# Altium PCB BBB_Board_NO_PLANES.PcbDoc
Units mil, origin at the board's own origin, x right, y up, seen from the top; angles counter-clockwise.
Board outline 11000 x 5000 mil, 2 copper layers (Top Layer, Bottom Layer); 109 components, 382 nets, 1064 pads, 0 vias.
Unrouted connection lines stored in the file: 670.
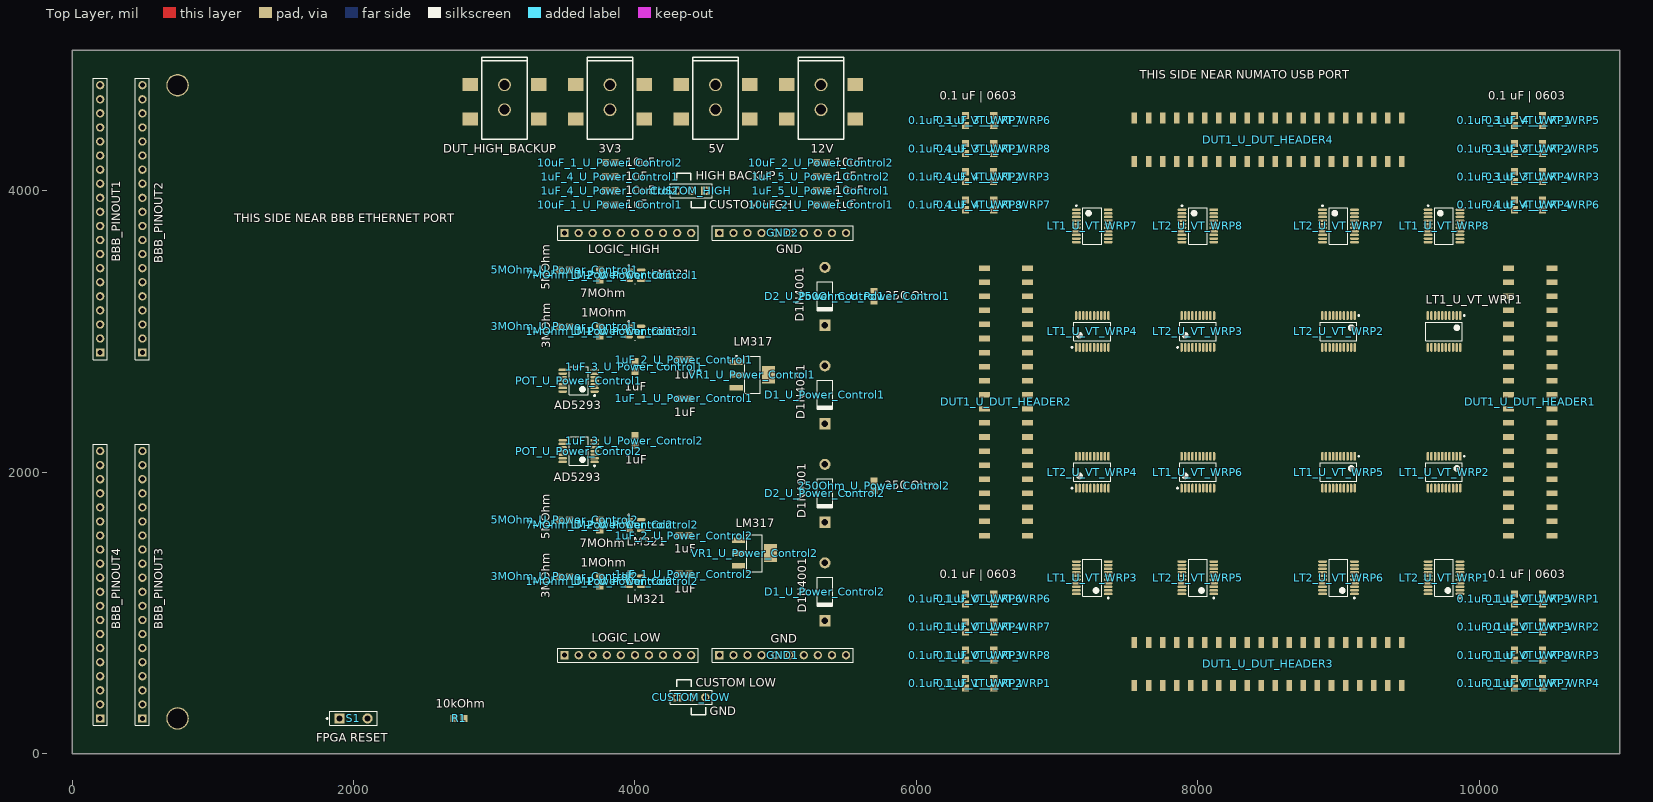
[diagram p0: Top Layer view]
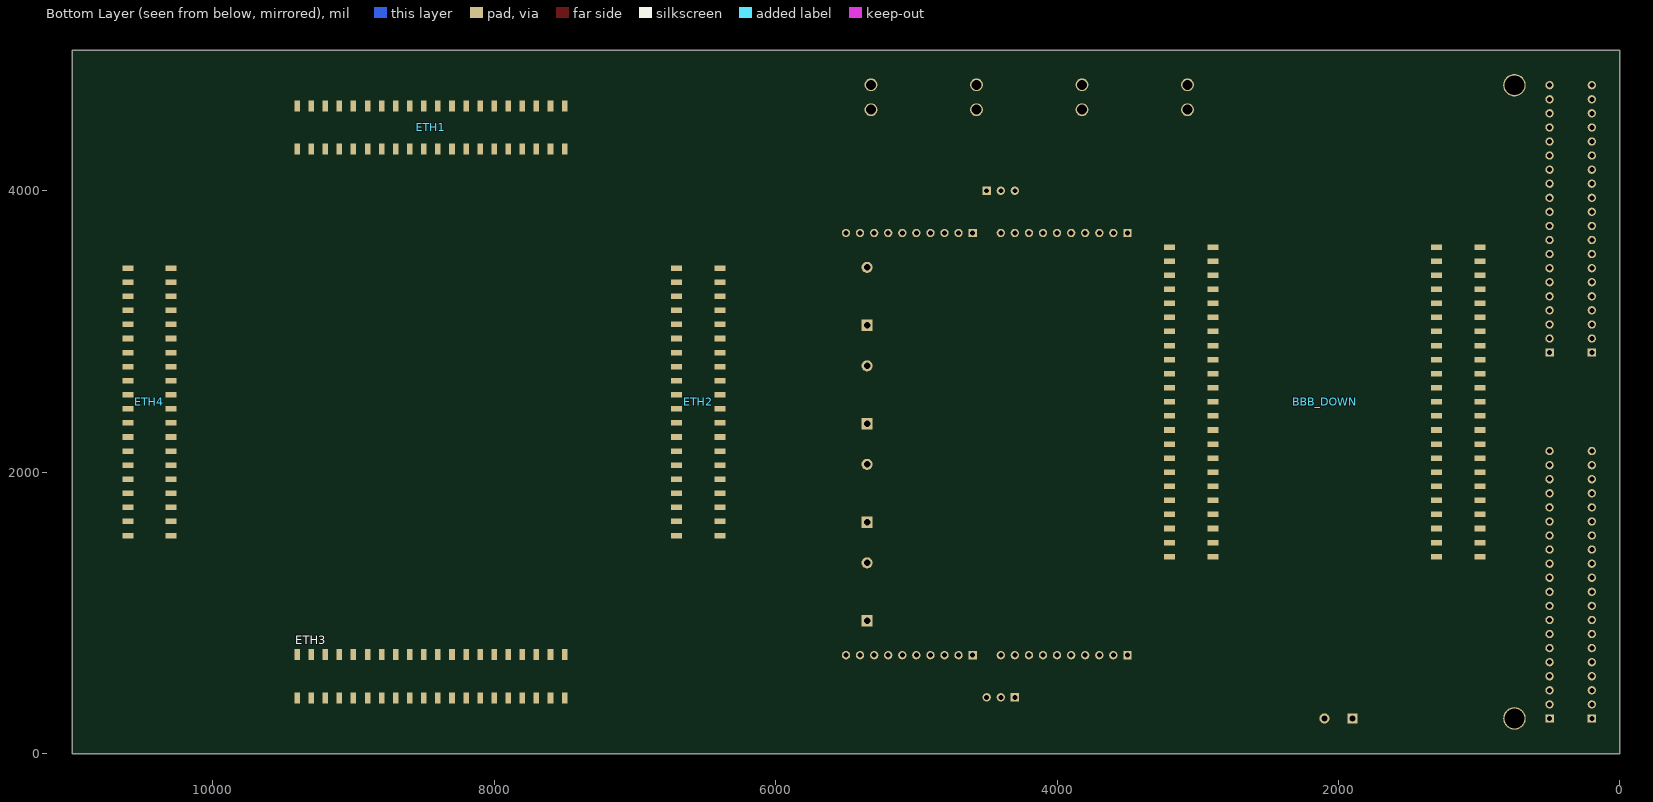
[diagram p1: Bottom Layer view, seen from below]

## Layer stack, top to bottom
Top Solder: solder mask 0.4, Solder Resist, Dk 3.5
Top Layer: signal copper 1.4
Dielectric 1: dielectric 12.6, FR-4, Dk 4.8
Bottom Layer: signal copper 1.4
Bottom Solder: solder mask 0.4, Solder Resist, Dk 3.5

## Board outline
0,0 11000,0 11000,5000 0,5000

## Design rules (kind name [scope] priority, off if disabled: settings)
Clearance [All] p1: gap=6
PolygonConnect [All] p1: connectstyle=Relief reliefconductorwidth=10 reliefentries=4 polygonreliefangle="90 Angle" airgapwidth=10
RoutingVias [All] p1: holewidth=15 width=30 viastyle="Through Hole" minholewidth=28 minwidth=50 maxholewidth=28 maxwidth=50
SolderMaskExpansion [All] p1: expansion=4
Width [All] p1: maxlimit=10 minlimit=10 preferedwidth=10
30 further rules are at their usual default settings.

## Classes and differential pairs
component class BBB_Board: 3V3 5V 12V BBB_DOWN BBB_PINOUT1 BBB_PINOUT2 BBB_PINOUT3 BBB_PINOUT4 CUSTOM_HIGH CUSTOM_LOW DUT_HIGH_BACKUP GND1 GND2 LOGIC_HIGH LOGIC_LOW R1 S1
component class U_DUT_HEADER1: DUT1_U_DUT_HEADER1
component class U_DUT_HEADER2: DUT1_U_DUT_HEADER2
component class U_DUT_HEADER3: DUT1_U_DUT_HEADER3
component class U_DUT_HEADER4: DUT1_U_DUT_HEADER4
component class U_NUMATO_HDR: ETH1 ETH2 ETH3 ETH4
component class U_Power_Control1: 1MOhm_U_Power_Control1 1uF_1_U_Power_Control1 1uF_2_U_Power_Control1 1uF_3_U_Power_Control1 1uF_4_U_Power_Control1 1uF_5_U_Power_Control1 3MOhm_U_Power_Control1 5MOhm_U_Power_Control1 7MOhm_U_Power_Control1 10uF_1_U_Power_Control1 10uF_2_U_Power_Control1 250Ohm_U_Power_Control1 D1_U_Power_Control1 D2_U_Power_Control1 LM1_U_Power_Control1 LM2_U_Power_Control1 POT_U_Power_Control1 VR1_U_Power_Control1
component class U_Power_Control2: 1MOhm_U_Power_Control2 1uF_1_U_Power_Control2 1uF_2_U_Power_Control2 1uF_3_U_Power_Control2 1uF_4_U_Power_Control2 1uF_5_U_Power_Control2 3MOhm_U_Power_Control2 5MOhm_U_Power_Control2 7MOhm_U_Power_Control2 10uF_1_U_Power_Control2 10uF_2_U_Power_Control2 250Ohm_U_Power_Control2 D1_U_Power_Control2 D2_U_Power_Control2 LM1_U_Power_Control2 LM2_U_Power_Control2 POT_U_Power_Control2 VR1_U_Power_Control2
component class U_VT_WRP1: 0.1uF_0_U_VT_WRP1 0.1uF_1_U_VT_WRP1 0.1uF_3_U_VT_WRP1 0.1uF_4_U_VT_WRP1 LT1_U_VT_WRP1 LT2_U_VT_WRP1
component class U_VT_WRP2: 0.1uF_0_U_VT_WRP2 0.1uF_1_U_VT_WRP2 0.1uF_3_U_VT_WRP2 0.1uF_4_U_VT_WRP2 LT1_U_VT_WRP2 LT2_U_VT_WRP2
component class U_VT_WRP3: 0.1uF_0_U_VT_WRP3 0.1uF_1_U_VT_WRP3 0.1uF_3_U_VT_WRP3 0.1uF_4_U_VT_WRP3 LT1_U_VT_WRP3 LT2_U_VT_WRP3
component class U_VT_WRP4: 0.1uF_0_U_VT_WRP4 0.1uF_1_U_VT_WRP4 0.1uF_3_U_VT_WRP4 0.1uF_4_U_VT_WRP4 LT1_U_VT_WRP4 LT2_U_VT_WRP4
component class U_VT_WRP5: 0.1uF_0_U_VT_WRP5 0.1uF_1_U_VT_WRP5 0.1uF_3_U_VT_WRP5 0.1uF_4_U_VT_WRP5 LT1_U_VT_WRP5 LT2_U_VT_WRP5
component class U_VT_WRP6: 0.1uF_0_U_VT_WRP6 0.1uF_1_U_VT_WRP6 0.1uF_3_U_VT_WRP6 0.1uF_4_U_VT_WRP6 LT1_U_VT_WRP6 LT2_U_VT_WRP6
component class U_VT_WRP7: 0.1uF_0_U_VT_WRP7 0.1uF_1_U_VT_WRP7 0.1uF_3_U_VT_WRP7 0.1uF_4_U_VT_WRP7 LT1_U_VT_WRP7 LT2_U_VT_WRP7
component class U_VT_WRP8: 0.1uF_0_U_VT_WRP8 0.1uF_1_U_VT_WRP8 0.1uF_3_U_VT_WRP8 0.1uF_4_U_VT_WRP8 LT1_U_VT_WRP8 LT2_U_VT_WRP8
net class IVL_B[127..0]: IVL_B0 IVL_B1 IVL_B2 IVL_B3 IVL_B4 IVL_B5 IVL_B6 IVL_B7 IVL_B8 IVL_B9 IVL_B10 IVL_B11 IVL_B12 IVL_B13 IVL_B14 IVL_B15 IVL_B16 IVL_B17 IVL_B18 IVL_B19 IVL_B20 IVL_B21 IVL_B22 IVL_B23 IVL_B24 IVL_B25 IVL_B26 IVL_B27 IVL_B28 IVL_B29 IVL_B30 IVL_B31 IVL_B32 IVL_B33 IVL_B34 IVL_B35 IVL_B36 IVL_B37 IVL_B38 IVL_B39 IVL_B40 IVL_B41 IVL_B42 IVL_B43 IVL_B44 IVL_B45 IVL_B46 IVL_B47 IVL_B48 IVL_B49 IVL_B50 IVL_B51 IVL_B52 IVL_B53 IVL_B54 IVL_B55 IVL_B56 IVL_B57 IVL_B58 IVL_B59 IVL_B60 IVL_B61 IVL_B62 IVL_B63 IVL_B64 IVL_B65 IVL_B66 IVL_B67 IVL_B68 IVL_B69 IVL_B70 IVL_B71 IVL_B72 IVL_B73 IVL_B74 IVL_B75 IVL_B76 IVL_B77 IVL_B78 IVL_B79 IVL_B80 IVL_B81 IVL_B82 IVL_B83 IVL_B84 IVL_B85 IVL_B86 IVL_B87 IVL_B88 IVL_B89 IVL_B90 IVL_B91 IVL_B92 IVL_B93 IVL_B94 IVL_B95 IVL_B96 IVL_B97 IVL_B98 IVL_B99 IVL_B100 IVL_B101 IVL_B102 IVL_B103 IVL_B104 IVL_B105 IVL_B106 IVL_B107 IVL_B108 IVL_B109 IVL_B110 IVL_B111 IVL_B112 IVL_B113 IVL_B114 IVL_B115 IVL_B116 IVL_B117 IVL_B118 IVL_B119 IVL_B120 IVL_B121 IVL_B122 IVL_B123 IVL_B124 IVL_B125 IVL_B126 IVL_B127
net class OVCC_B[127..0]: OVCC_B0 OVCC_B1 OVCC_B2 OVCC_B3 OVCC_B4 OVCC_B5 OVCC_B6 OVCC_B7 OVCC_B8 OVCC_B9 OVCC_B10 OVCC_B11 OVCC_B12 OVCC_B13 OVCC_B14 OVCC_B15 OVCC_B16 OVCC_B17 OVCC_B18 OVCC_B19 OVCC_B20 OVCC_B21 OVCC_B22 OVCC_B23 OVCC_B24 OVCC_B25 OVCC_B26 OVCC_B27 OVCC_B28 OVCC_B29 OVCC_B30 OVCC_B31 OVCC_B32 OVCC_B33 OVCC_B34 OVCC_B35 OVCC_B36 OVCC_B37 OVCC_B38 OVCC_B39 OVCC_B40 OVCC_B41 OVCC_B42 OVCC_B43 OVCC_B44 OVCC_B45 OVCC_B46 OVCC_B47 OVCC_B48 OVCC_B49 OVCC_B50 OVCC_B51 OVCC_B52 OVCC_B53 OVCC_B54 OVCC_B55 OVCC_B56 OVCC_B57 OVCC_B58 OVCC_B59 OVCC_B60 OVCC_B61 OVCC_B62 OVCC_B63 OVCC_B64 OVCC_B65 OVCC_B66 OVCC_B67 OVCC_B68 OVCC_B69 OVCC_B70 OVCC_B71 OVCC_B72 OVCC_B73 OVCC_B74 OVCC_B75 OVCC_B76 OVCC_B77 OVCC_B78 OVCC_B79 OVCC_B80 OVCC_B81 OVCC_B82 OVCC_B83 OVCC_B84 OVCC_B85 OVCC_B86 OVCC_B87 OVCC_B88 OVCC_B89 OVCC_B90 OVCC_B91 OVCC_B92 OVCC_B93 OVCC_B94 OVCC_B95 OVCC_B96 OVCC_B97 OVCC_B98 OVCC_B99 OVCC_B100 OVCC_B101 OVCC_B102 OVCC_B103 OVCC_B104 OVCC_B105 OVCC_B106 OVCC_B107 OVCC_B108 OVCC_B109 OVCC_B110 OVCC_B111 OVCC_B112 OVCC_B113 OVCC_B114 OVCC_B115 OVCC_B116 OVCC_B117 OVCC_B118 OVCC_B119 OVCC_B120 OVCC_B121 OVCC_B122 OVCC_B123 OVCC_B124 OVCC_B125 OVCC_B126 OVCC_B127
channel class DUT_HEADER: U_DUT_HEADER1 U_DUT_HEADER2 U_DUT_HEADER3 U_DUT_HEADER4
channel class POW_CONT: U_Power_Control1 U_Power_Control2
channel class VT_WRP: U_VT_WRP1 U_VT_WRP2 U_VT_WRP3 U_VT_WRP4 U_VT_WRP5 U_VT_WRP6 U_VT_WRP7 U_VT_WRP8

## Components (designator, comment, footprint, x,y, rotation, side; value= is the part's Value field where it differs from the comment)
0.1uF_0_U_VT_WRP1 "0.1uF_0603" 0.1uF_0603 10450,1100 r90 top (schematic designator 0.1uF_0)
0.1uF_0_U_VT_WRP2 "0.1uF_0603" 0.1uF_0603 10450,900 r90 top (schematic designator 0.1uF_0)
0.1uF_0_U_VT_WRP3 "0.1uF_0603" 0.1uF_0603 10450,700 r90 top (schematic designator 0.1uF_0)
0.1uF_0_U_VT_WRP4 "0.1uF_0603" 0.1uF_0603 10450,500 r90 top (schematic designator 0.1uF_0)
0.1uF_0_U_VT_WRP5 "0.1uF_0603" 0.1uF_0603 10250,901 r90 top (schematic designator 0.1uF_0)
0.1uF_0_U_VT_WRP6 "0.1uF_0603" 0.1uF_0603 6550,1100 r90 top (schematic designator 0.1uF_0)
0.1uF_0_U_VT_WRP7 "0.1uF_0603" 0.1uF_0603 6550,900 r90 top (schematic designator 0.1uF_0)
0.1uF_0_U_VT_WRP8 "0.1uF_0603" 0.1uF_0603 6550,700 r90 top (schematic designator 0.1uF_0)
0.1uF_1_U_VT_WRP1 "0.1uF_0603" 0.1uF_0603 6550,500 r90 top (schematic designator 0.1uF_1)
0.1uF_1_U_VT_WRP2 "0.1uF_0603" 0.1uF_0603 6350,500 r90 top (schematic designator 0.1uF_1)
0.1uF_1_U_VT_WRP3 "0.1uF_0603" 0.1uF_0603 6350,700 r90 top (schematic designator 0.1uF_1)
0.1uF_1_U_VT_WRP4 "0.1uF_0603" 0.1uF_0603 6350,900 r90 top (schematic designator 0.1uF_1)
0.1uF_1_U_VT_WRP5 "0.1uF_0603" 0.1uF_0603 10250,1100 r90 top (schematic designator 0.1uF_1)
0.1uF_1_U_VT_WRP6 "0.1uF_0603" 0.1uF_0603 6350,1100 r90 top (schematic designator 0.1uF_1)
0.1uF_1_U_VT_WRP7 "0.1uF_0603" 0.1uF_0603 10250,500 r90 top (schematic designator 0.1uF_1)
0.1uF_1_U_VT_WRP8 "0.1uF_0603" 0.1uF_0603 10250,700 r90 top (schematic designator 0.1uF_1)
0.1uF_3_U_VT_WRP1 "0.1uF_0603" 0.1uF_0603 10250,4500 r270 top (schematic designator 0.1uF_3)
0.1uF_3_U_VT_WRP2 "0.1uF_0603" 0.1uF_0603 10250,4300 r270 top (schematic designator 0.1uF_3)
0.1uF_3_U_VT_WRP3 "0.1uF_0603" 0.1uF_0603 10450,4100 r270 top (schematic designator 0.1uF_3)
0.1uF_3_U_VT_WRP4 "0.1uF_0603" 0.1uF_0603 10250,4100 r270 top (schematic designator 0.1uF_3)
0.1uF_3_U_VT_WRP5 "0.1uF_0603" 0.1uF_0603 10450,4300 r270 top (schematic designator 0.1uF_3)
0.1uF_3_U_VT_WRP6 "0.1uF_0603" 0.1uF_0603 6550,4500 r270 top (schematic designator 0.1uF_3)
0.1uF_3_U_VT_WRP7 "0.1uF_0603" 0.1uF_0603 6350,4500 r270 top (schematic designator 0.1uF_3)
0.1uF_3_U_VT_WRP8 "0.1uF_0603" 0.1uF_0603 6550,4300 r270 top (schematic designator 0.1uF_3)
0.1uF_4_U_VT_WRP1 "0.1uF_0603" 0.1uF_0603 6350,4300 r270 top (schematic designator 0.1uF_4)
0.1uF_4_U_VT_WRP2 "0.1uF_0603" 0.1uF_0603 6350,4100 r270 top (schematic designator 0.1uF_4)
0.1uF_4_U_VT_WRP3 "0.1uF_0603" 0.1uF_0603 6548,4101 r270 top (schematic designator 0.1uF_4)
0.1uF_4_U_VT_WRP4 "0.1uF_0603" 0.1uF_0603 10250,3900 r270 top (schematic designator 0.1uF_4)
0.1uF_4_U_VT_WRP5 "0.1uF_0603" 0.1uF_0603 10450,4500 r270 top (schematic designator 0.1uF_4)
0.1uF_4_U_VT_WRP6 "0.1uF_0603" 0.1uF_0603 10450,3900 r270 top (schematic designator 0.1uF_4)
0.1uF_4_U_VT_WRP7 "0.1uF_0603" 0.1uF_0603 6550,3900 r270 top (schematic designator 0.1uF_4)
0.1uF_4_U_VT_WRP8 "0.1uF_0603" 0.1uF_0603 6350,3900 r270 top (schematic designator 0.1uF_4)
1MOhm_U_Power_Control1 "RNCS0603BKE10K0" 0.1uF_0603 3750,3002 r90 top (schematic designator 1MOhm)
1MOhm_U_Power_Control2 "RNCS0603BKE10K0" 0.1uF_0603 3750,1225 r90 top (schematic designator 1MOhm)
1uF_1_U_Power_Control1 "0.1uF_0603" 0.1uF_0603 4350,2525 r0 top (schematic designator 1uF_1)
1uF_1_U_Power_Control2 "0.1uF_0603" 0.1uF_0603 4350,1275 r0 top (schematic designator 1uF_1)
1uF_2_U_Power_Control1 "0.1uF_0603" 0.1uF_0603 4350,2800 r0 top (schematic designator 1uF_2)
1uF_2_U_Power_Control2 "0.1uF_0603" 0.1uF_0603 4350,1550 r0 top (schematic designator 1uF_2)
1uF_3_U_Power_Control1 "0.1uF_0603" 0.1uF_0603 4000,2750 r90 top (schematic designator 1uF_3)
1uF_3_U_Power_Control2 "0.1uF_0603" 0.1uF_0603 4000,2225 r90 top (schematic designator 1uF_3)
1uF_4_U_Power_Control1 "0.1uF_0603" 0.1uF_0603 3825,4100 r180 top (schematic designator 1uF_4)
1uF_4_U_Power_Control2 "0.1uF_0603" 0.1uF_0603 3825,4000 r180 top (schematic designator 1uF_4)
1uF_5_U_Power_Control1 "0.1uF_0603" 0.1uF_0603 5325,4000 r180 top (schematic designator 1uF_5)
1uF_5_U_Power_Control2 "0.1uF_0603" 0.1uF_0603 5325,4100 r180 top (schematic designator 1uF_5)
3MOhm_U_Power_Control1 "RNCS0603BKE10K0" 0.1uF_0603 3500,3037 r180 top (schematic designator 3MOhm)
3MOhm_U_Power_Control2 "RNCS0603BKE10K0" 0.1uF_0603 3500,1260 r180 top (schematic designator 3MOhm)
3V3 "PJ-002BH-SMT-TR" CP-002BHPJCT-ND 4000,4950 r180 top
5MOhm_U_Power_Control1 "RNCS0603BKE10K0" 0.1uF_0603 3500,3437 r180 top (schematic designator 5MOhm)
5MOhm_U_Power_Control2 "RNCS0603BKE10K0" 0.1uF_0603 3500,1661 r180 top (schematic designator 5MOhm)
5V "PJ-002BH-SMT-TR" CP-002BHPJCT-ND 4750,4950 r180 top
7MOhm_U_Power_Control1 "RNCS0603BKE10K0" 0.1uF_0603 3750,3402 r90 top (schematic designator 7MOhm)
7MOhm_U_Power_Control2 "RNCS0603BKE10K0" 0.1uF_0603 3750,1626 r90 top (schematic designator 7MOhm)
10uF_1_U_Power_Control1 "0.1uF_0603" 0.1uF_0603 3825,3900 r180 top (schematic designator 10uF_1)
10uF_1_U_Power_Control2 "0.1uF_0603" 0.1uF_0603 3825,4200 r180 top (schematic designator 10uF_1)
10uF_2_U_Power_Control1 "0.1uF_0603" 0.1uF_0603 5325,3900 r180 top (schematic designator 10uF_2)
10uF_2_U_Power_Control2 "0.1uF_0603" 0.1uF_0603 5325,4200 r180 top (schematic designator 10uF_2)
12V "PJ-002BH-SMT-TR" CP-002BHPJCT-ND 5500,4950 r180 top
250Ohm_U_Power_Control1 "RNCS0603BKE10K0" 0.1uF_0603 5700,3250 r270 top (schematic designator 250Ohm)
250Ohm_U_Power_Control2 "RNCS0603BKE10K0" 0.1uF_0603 5700,1904 r270 top (schematic designator 250Ohm)
BBB_DOWN "BBB_Pin" BBB_Pin 3200,3600 r180 bottom
BBB_PINOUT1 "Header 20" HDR1X20 200,2850 r90 top
BBB_PINOUT2 "Header 20" HDR1X20 500,2850 r90 top
BBB_PINOUT3 "Header 20" HDR1X20 500,250 r90 top
BBB_PINOUT4 "Header 20" HDR1X20 200,250 r90 top
CUSTOM_HIGH "Header 3" HDR1X3 4500,4000 r180 top
CUSTOM_LOW "Header 3" HDR1X3 4300,400 r0 top
D1_U_Power_Control1 "Diode 1N4001" DO-41 5350,2550 r270 top (schematic designator D1)
D1_U_Power_Control2 "Diode 1N4001" DO-41 5350,1150 r270 top (schematic designator D1)
D2_U_Power_Control1 "Diode 1N4001" DO-41 5350,3250 r270 top (schematic designator D2)
D2_U_Power_Control2 "Diode 1N4001" DO-41 5350,1850 r270 top (schematic designator D2)
DUT1_U_DUT_HEADER1 "ADAFRUIT_HEADER" FEMALE_HEADER_SMD 10362.5,2500 r90 top (schematic designator DUT1)
DUT1_U_DUT_HEADER2 "ADAFRUIT_HEADER" FEMALE_HEADER_SMD 6637.5,2500 r270 top (schematic designator DUT1)
DUT1_U_DUT_HEADER3 "ADAFRUIT_HEADER" FEMALE_HEADER_SMD 8500,637.5 r0 top (schematic designator DUT1)
DUT1_U_DUT_HEADER4 "ADAFRUIT_HEADER" FEMALE_HEADER_SMD 8500,4362.5 r180 top (schematic designator DUT1)
DUT_HIGH_BACKUP "PJ-002BH-SMT-TR" CP-002BHPJCT-ND 3250,4950 r180 top
ETH1 "ADAFRUIT_HEADER" FEMALE_HEADER_SMD 8450,4450 r180 bottom
ETH2 "ADAFRUIT_HEADER" FEMALE_HEADER_SMD 6550,2500 r90 bottom
ETH3 "ADAFRUIT_HEADER" FEMALE_HEADER_SMD 8450,550 r0 bottom
ETH4 "ADAFRUIT_HEADER" FEMALE_HEADER_SMD 10450,2500 r270 bottom
GND1 "Header 10" HDR1X10 4600,700 r0 top
GND2 "Header 10" HDR1X10 4600,3700 r0 top
LM1_U_Power_Control1 "LM321MF/NOPB" op_amp 4000,3000 r0 top (schematic designator LM1)
LM1_U_Power_Control2 "LM321MF/NOPB" op_amp 4000,1225 r0 top (schematic designator LM1)
LM2_U_Power_Control1 "LM321MF/NOPB" op_amp 4000,3400 r0 top (schematic designator LM2)
LM2_U_Power_Control2 "LM321MF/NOPB" op_amp 4000,1625 r0 top (schematic designator LM2)
LOGIC_HIGH "Header 10" HDR1X10 3500,3700 r0 top
LOGIC_LOW "Header 10" HDR1X10 3500,700 r0 top
LT1_U_VT_WRP1 "8-Chanel Level Translator" 8-bit_level 9750,3000 r270 top (schematic designator LT1)
LT1_U_VT_WRP2 "8-Chanel Level Translator" 8-bit_level 9750,2000 r270 top (schematic designator LT1)
LT1_U_VT_WRP3 "8-Chanel Level Translator" 8-bit_level 7250,1250 r180 top (schematic designator LT1)
LT1_U_VT_WRP4 "8-Chanel Level Translator" 8-bit_level 7250,3000 r90 top (schematic designator LT1)
LT1_U_VT_WRP5 "8-Chanel Level Translator" 8-bit_level 9000,2000 r270 top (schematic designator LT1)
LT1_U_VT_WRP6 "8-Chanel Level Translator" 8-bit_level 8000,2000 r90 top (schematic designator LT1)
LT1_U_VT_WRP7 "8-Chanel Level Translator" 8-bit_level 7250,3750 r0 top (schematic designator LT1)
LT1_U_VT_WRP8 "8-Chanel Level Translator" 8-bit_level 9750,3750 r0 top (schematic designator LT1)
LT2_U_VT_WRP1 "8-Chanel Level Translator" 8-bit_level 9750,1250 r180 top (schematic designator LT2)
LT2_U_VT_WRP2 "8-Chanel Level Translator" 8-bit_level 9000,3000 r270 top (schematic designator LT2)
LT2_U_VT_WRP3 "8-Chanel Level Translator" 8-bit_level 8000,3000 r90 top (schematic designator LT2)
LT2_U_VT_WRP4 "8-Chanel Level Translator" 8-bit_level 7250,2000 r90 top (schematic designator LT2)
LT2_U_VT_WRP5 "8-Chanel Level Translator" 8-bit_level 8000,1250 r180 top (schematic designator LT2)
LT2_U_VT_WRP6 "8-Chanel Level Translator" 8-bit_level 9000,1250 r180 top (schematic designator LT2)
LT2_U_VT_WRP7 "8-Chanel Level Translator" 8-bit_level 9000,3750 r0 top (schematic designator LT2)
LT2_U_VT_WRP8 "8-Chanel Level Translator" 8-bit_level 8000,3750 r0 top (schematic designator LT2)
POT_U_Power_Control1 "Digital Pot" Dig_Pot 3600,2650 r180 top (schematic designator POT)
POT_U_Power_Control2 "Digital Pot" Dig_Pot 3600,2150 r180 top (schematic designator POT)
R1 "RNCS0603BKE10K0" 0.1uF_0603 2750,250 r180 top
S1 "SW-PB" SPST-2 2000,250 r0 top
VR1_U_Power_Control1 "Voltage Regulator" volt_reg 4835,2692 r0 top (schematic designator VR1)
VR1_U_Power_Control2 "Voltage Regulator" volt_reg 4850,1425 r0 top (schematic designator VR1)

## Footprints (in the part's own frame and the unit in brackets; to place one, negate y for a bottom-side part, rotate by r counter-clockwise, add the part's x,y. Pads: shape width x height; smd on the part's side, far side on the other; paste and mask are expansions set on the pad)
0.1uF_0603 [mil]
  rect 50x50 smd: 1(-35,0) 2(35,0)
8-bit_level [mm]
  oval 1.6x0.45 smd: 1(-2.875,2.925) 2(-2.875,2.275) 3(-2.875,1.625) 4(-2.875,0.975) 5(-2.875,0.325) 6(-2.875,-0.325) 7(-2.875,-0.975) 8(-2.875,-1.625) 9(-2.875,-2.275) 10(-2.875,-2.925) 11(2.875,-2.925) 12(2.875,-2.275) 13(2.875,-1.625) 14(2.875,-0.975) 15(2.875,-0.325) 16(2.875,0.325) 17(2.875,0.975) 18(2.875,1.625) 19(2.875,2.275) 20(2.875,2.925)
  silkscreen extent -3,-3.3 1.68,3.78, body extent -2.25,-3.3 2.25,3.3, height 1.1
BBB_Pin [mm]
  rect 2x1 smd: 1(55.986,0) 2(48.186,0) 3(55.986,-2.54) 4(48.186,-2.54) 5(55.986,-5.08) 6(48.186,-5.08) 7(55.986,-7.62) 8(48.186,-7.62) 9(55.986,-10.16) 10(48.186,-10.16) 11(55.986,-12.7) 12(48.186,-12.7) 13(55.986,-15.24) 14(48.186,-15.24) 15(55.986,-17.78) 16(48.186,-17.78) 17(55.986,-20.32) 18(48.186,-20.32) 19(55.986,-22.86) 20(48.186,-22.86) 21(55.986,-25.4) 22(48.186,-25.4) 23(55.986,-27.94) 24(48.186,-27.94) 25(55.986,-30.48) 26(48.186,-30.48) 27(55.986,-33.02) 28(48.186,-33.02) 29(55.986,-35.56) 30(48.186,-35.56) 31(55.986,-38.1) 32(48.186,-38.1) 33(55.986,-40.64) 34(48.186,-40.64) 35(55.986,-43.18) 36(48.186,-43.18) 37(55.986,-45.72) 38(48.186,-45.72) 39(55.986,-48.26) 40(48.186,-48.26) 41(55.986,-50.8) 42(48.186,-50.8) 43(55.986,-53.34) 44(48.186,-53.34) 45(55.986,-55.88) 46(48.186,-55.88) 47(7.8,0) 48(0,0) 49(7.8,-2.54) 50(0,-2.54) 51(7.8,-5.08) 52(0,-5.08) 53(7.8,-7.62) 54(0,-7.62) 56(0,-10.16) 57(7.8,-12.7) 58(0,-12.7) 59(7.8,-15.24) 60(0,-15.24) 61(7.8,-17.78) 62(0,-17.78) 63(7.8,-20.32) 64(0,-20.32) 65(7.8,-22.86) 66(0,-22.86) 67(7.8,-25.4) 68(0,-25.4) 69(7.8,-27.94) 70(0,-27.94) 71(7.8,-30.48) 72(0,-30.48) 73(7.8,-33.02) 74(0,-33.02) 75(7.8,-35.56) 76(0,-35.56) 77(7.8,-38.1) 78(0,-38.1) 79(7.8,-40.64) 80(0,-40.64) 81(7.8,-43.18) 82(0,-43.18) 83(7.8,-45.72) 84(0,-45.72) 85(7.8,-48.26) 86(0,-48.26) 87(7.8,-50.8) 88(0,-50.8) 89(7.8,-53.34) 90(0,-53.34) 91(7.8,-55.88) 92(0,-55.88)
  rect 2x1 smd mask+0.102: 55(7.8,-10.16)
CP-002BHPJCT-ND [mm] "barrel jack"
  rect 2.8x2.4 smd: 1(-1.651,11.176) 1(-1.651,4.953) 2(10.668,4.953) 3(10.668,11.176)
  round 2.311 hole 1.8 unplated: H(4.5,9.5) H(4.5,5)
  silkscreen extent 0.38,0 8.64,14.86
Dig_Pot [mm]
  oval 1.55x0.45 smd: 1(-2.875,1.95) 2(-2.875,1.3) 3(-2.875,0.65) 4(-2.875,0) 5(-2.875,-0.65) 6(-2.875,-1.3) 7(-2.875,-1.95) 8(2.875,-1.95) 9(2.875,-1.3) 10(2.875,-0.65) 11(2.875,0) 12(2.875,0.65) 13(2.875,1.3) 14(2.875,1.95)
  silkscreen extent -3,-2.55 1.7,2.8, body extent -2.25,-2.55 2.25,2.55, height 1.2
DO-41 [mm] "Diode, Axial; Body 5.2 x 2.7 mm (LxDia. max), Lead Dia. 0.86 mm (max)"
  round 2 hole 1.2: 1(-5.23,0)
  rect 2x2 hole 1.2: 2(5.23,0)
  silkscreen extent -2.65,-1.4 2.75,1.4
FEMALE_HEADER_SMD [mm]
  rect 1x2 smd: 1(-24.13,-3.9) 2(-21.59,-3.9) 3(-19.05,-3.9) 4(-16.51,-3.9) 5(-13.97,-3.9) 6(-11.43,-3.9) 7(-8.89,-3.9) 8(-6.35,-3.9) 9(-3.81,-3.9) 10(-1.27,-3.9) 11(1.27,-3.9) 12(3.81,-3.9) 13(6.35,-3.9) 14(8.89,-3.9) 15(11.43,-3.9) 16(13.97,-3.9) 17(16.51,-3.9) 18(19.05,-3.9) 19(21.59,-3.9) 20(24.13,-3.9) 21(24.13,3.9) 22(21.59,3.9) 23(19.05,3.9) 24(16.51,3.9) 25(13.97,3.9) 26(11.43,3.9) 27(8.89,3.9) 28(6.35,3.9) 29(3.81,3.9) 30(1.27,3.9) 31(-1.27,3.9) 32(-3.81,3.9) 33(-6.35,3.9) 34(-8.89,3.9) 35(-11.43,3.9) 36(-13.97,3.9) 37(-16.51,3.9) 38(-19.05,3.9) 39(-21.59,3.9) 40(-24.13,3.9)
HDR1X3 [mm] "Connector; Header; 3 Position"
  rect 1.5x1.5 hole 0.9: 1(0,0)
  round 1.5 hole 0.9: 2(2.54,0) 3(5.08,0)
  silkscreen extent -1.27,-1.27 6.35,1.27
HDR1X10 [mm] "Connector; Header; 10 Position"
  rect 1.5x1.5 hole 0.9: 1(0,0)
  round 1.5 hole 0.9: 2(2.54,0) 3(5.08,0) 4(7.62,0) 5(10.16,0) 6(12.7,0) 7(15.24,0) 8(17.78,0) 9(20.32,0) 10(22.86,0)
  silkscreen extent -1.27,-1.27 24.13,1.27
HDR1X20 [mm] "Connector; Header; 20 Position"
  rect 1.5x1.5 hole 0.9: 1(0,0)
  round 1.5 hole 0.9: 2(2.54,0) 3(5.08,0) 4(7.62,0) 5(10.16,0) 6(12.7,0) 7(15.24,0) 8(17.78,0) 9(20.32,0) 10(22.86,0) 11(25.4,0) 12(27.94,0) 13(30.48,0) 14(33.02,0) 15(35.56,0) 16(38.1,0) 17(40.64,0) 18(43.18,0) 19(45.72,0) 20(48.26,0)
  silkscreen extent -1.27,-1.27 49.53,1.27
op_amp [mm]
  oval 1.55x0.6 smd: 1(-1.125,0.95) 2(-1.125,0) 3(-1.125,-0.95) 4(1.125,-0.95) 5(1.125,0.95)
  silkscreen extent -1.25,-1.55 0.05,1.92, body extent -0.9,-1.55 0.9,1.55, height 1.45
SPST-2 [mm] "Switch; 2 Leads"
  rect 1.85x1.85 hole 1.1: 1(-2.54,0)
  round 1.85 hole 1.1: 2(2.54,0)
  silkscreen extent -4.89,-1.27 4.28,1.27
volt_reg [mm] "SOT223, 4-Leads, Body 6.50x7.00mm (avg), Pitch 2.30mm, IPC Medium Density"
  rect 2.4x1 smd: 1(-2.9,2.3) 2(-2.9,0) 3(-2.9,-2.3)
  rect 2.4x3.2 smd: 4(2.9,0)
  silkscreen extent -3.02,-3.35 1.4,3.47, body extent -1.85,-3.35 1.85,3.35, height 1.8

## Part data
1MOhm_U_Power_Control1 1MOhm_U_Power_Control2 3MOhm_U_Power_Control1 3MOhm_U_Power_Control2 5MOhm_U_Power_Control1 5MOhm_U_Power_Control2 7MOhm_U_Power_Control1 7MOhm_U_Power_Control2 250Ohm_U_Power_Control1 250Ohm_U_Power_Control2 R1: "RES 10K OHM 1/16W 0.1% 0603"
3V3 5V 12V DUT_HIGH_BACKUP: "CONN POWER JACK 2.5X5.5MM HI CUR"
BBB_PINOUT1 BBB_PINOUT2 BBB_PINOUT3 BBB_PINOUT4: "Header, 20-Pin"
CUSTOM_HIGH CUSTOM_LOW: "Header, 3-Pin"
D1_U_Power_Control1 D1_U_Power_Control2 D2_U_Power_Control1 D2_U_Power_Control2: "1 Amp General Purpose Rectifier"
DUT1_U_DUT_HEADER1 DUT1_U_DUT_HEADER2 DUT1_U_DUT_HEADER3 DUT1_U_DUT_HEADER4 ETH1 ETH2 ETH3 ETH4: "Extra tall female header (SMD)"
GND1 GND2 LOGIC_HIGH LOGIC_LOW: "Header, 10-Pin"
LM1_U_Power_Control1 LM1_U_Power_Control2 LM2_U_Power_Control1 LM2_U_Power_Control2: "IC OPAMP GP 1MHZ SOT23-5"
LT1_U_VT_WRP1 LT1_U_VT_WRP2 LT1_U_VT_WRP3 LT1_U_VT_WRP4 LT1_U_VT_WRP5 LT1_U_VT_WRP6 LT1_U_VT_WRP7 LT1_U_VT_WRP8 LT2_U_VT_WRP1 LT2_U_VT_WRP2 LT2_U_VT_WRP3 LT2_U_VT_WRP4 LT2_U_VT_WRP5 LT2_U_VT_WRP6 LT2_U_VT_WRP7 LT2_U_VT_WRP8: "IC XLATR LEVEL BIDIR 8CH 20TSSOP"
POT_U_Power_Control1 POT_U_Power_Control2: "IC DGTL POT 1024POS 20K 14TSSOP"
S1: "Switch"
VR1_U_Power_Control1 VR1_U_Power_Control2: "IC REG LDO ADJ 1.5A DDPAK"

## Free pads (board coordinates)
  round 160 hole 140 unplated: 0(750,250) 0(750,4750)

## Nets (pads, with @x,y where several pads share a name; then routed paths per layer and width w, separated by ;. In a path a pad name is that pad's centre, name@x,y a point inside that pad or via, vN(x,y) a via of type N, cw(c..) or ccw(c..) an arc to the next point about the centre after c; other vN are vias at no path point)
12V_W_U_Power_Control1: 1uF_5_U_Power_Control1.2 1uF_5_U_Power_Control2.2 5MOhm_U_Power_Control1.2 5MOhm_U_Power_Control2.2 10uF_2_U_Power_Control1.2 10uF_2_U_Power_Control2.2 12V.2 12V.3 LM2_U_Power_Control1.5 LM2_U_Power_Control2.5 POT_U_Power_Control1.6 POT_U_Power_Control2.6
-5V_W_U_Power_Control1: 3MOhm_U_Power_Control1.2 3MOhm_U_Power_Control2.2 5V.1 LM1_U_Power_Control1.2 LM1_U_Power_Control2.2
BBB_AIN0: BBB_DOWN.39 BBB_PINOUT3.17
BBB_AIN1: BBB_DOWN.40 BBB_PINOUT3.16
BBB_AIN2: BBB_DOWN.37 BBB_PINOUT3.19
BBB_AIN3: BBB_DOWN.38 BBB_PINOUT3.18
BBB_AIN4: BBB_DOWN.33 BBB_PINOUT1.3
BBB_AIN5: BBB_DOWN.36 BBB_PINOUT3.20
BBB_AIN6: BBB_DOWN.35 BBB_PINOUT1.1
BBB_DCS_DATA1: BBB_DOWN.92 BBB_PINOUT4.2
BBB_ECAPWMO: BBB_DOWN.42 BBB_PINOUT3.14
BBB_EHRPWM1A: BBB_DOWN.14 BBB_PINOUT1.10
BBB_EHRPWM1B: BBB_DOWN.16 BBB_PINOUT1.9
BBB_EHRPWM2A: BBB_DOWN.65 BBB_PINOUT2.18
BBB_EHRPWM2B: BBB_DOWN.59 BBB_PINOUT3.4
BBB_GND_ADC: BBB_DOWN.34 BBB_PINOUT1.2
BBB_GPIO_20: BBB_DOWN.41 BBB_PINOUT3.15
BBB_GPIO_26: BBB_DOWN.60 BBB_PINOUT3.3
BBB_GPIO_27: BBB_DOWN.63 BBB_PINOUT2.20
BBB_GPIO_44: BBB_DOWN.58 BBB_PINOUT3.5
BBB_GPIO_45: BBB_DOWN.57 BBB_PINOUT3.6
BBB_GPIO_46: BBB_DOWN.62 BBB_PINOUT3.1
BBB_GPIO_47: BBB_DOWN.61 BBB_PINOUT3.2
BBB_GPIO_60: BBB_PINOUT1.11
BBB_GPIO_61: BBB_DOWN.72 BBB_PINOUT2.11
BBB_GPIO_65: BBB_DOWN.64 BBB_PINOUT2.19
BBB_GPIO_66: BBB_DOWN.53 BBB_PINOUT3.9
BBB_GPIO_67: BBB_DOWN.54
BBB_GPIO_68: BBB_DOWN.56 BBB_PINOUT3.7
BBB_GPIO_69: BBB_DOWN.55 BBB_PINOUT3.8
BBB_GPIO_115: BBB_DOWN.27 BBB_PINOUT1.5
BBB_GPIO_117: BBB_DOWN.25 BBB_PINOUT1.6
BBB_I2C2_SCL: BBB_DOWN.19 BBB_PINOUT1.8
BBB_I2C_SDA: BBB_DOWN.20 BBB_PINOUT1.7
BBB_LCD_AC_BIAS: BBB_DOWN.76 BBB_PINOUT4.20
BBB_LCD_DATA0: BBB_DOWN.91 BBB_PINOUT4.1
BBB_LCD_DATA2: BBB_DOWN.89 BBB_PINOUT4.3
BBB_LCD_DATA3: BBB_DOWN.90 BBB_PINOUT4.4
BBB_LCD_DATA4: BBB_DOWN.87 BBB_PINOUT4.5
BBB_LCD_DATA5: BBB_DOWN.88 BBB_PINOUT4.6
BBB_LCD_DATA6: BBB_DOWN.85 BBB_PINOUT4.7
BBB_LCD_DATA7: BBB_DOWN.86 BBB_PINOUT4.8
BBB_LCD_DATA8: BBB_DOWN.83 BBB_PINOUT4.9
BBB_LCD_DATA9: BBB_DOWN.84 BBB_PINOUT4.10
BBB_LCD_DATA10: BBB_DOWN.82 BBB_PINOUT4.11
BBB_LCD_DATA11: BBB_DOWN.80 BBB_PINOUT4.12
BBB_LCD_DATA12: BBB_DOWN.81 BBB_PINOUT4.13
BBB_LCD_DATA13: BBB_DOWN.79 BBB_PINOUT4.14
BBB_LCD_DATA14: BBB_DOWN.77 BBB_PINOUT4.15
BBB_LCD_DATA15: BBB_DOWN.78 BBB_PINOUT4.16
BBB_LCD_HSYNC: BBB_DOWN.75 BBB_PINOUT4.19
BBB_LCD_PCLK: BBB_DOWN.74 BBB_PINOUT4.17
BBB_LCD_VSYNC: BBB_DOWN.73 BBB_PINOUT4.18
BBB_MMC1_CLK: BBB_DOWN.67 BBB_PINOUT2.16
BBB_MMC1_CMD: BBB_DOWN.66 BBB_PINOUT2.17
BBB_MMC1_DAT0: BBB_DOWN.71 BBB_PINOUT2.12
BBB_MMC1_DAT1: BBB_DOWN.70 BBB_PINOUT2.13
BBB_MMC1_DAT2: BBB_DOWN.51 BBB_PINOUT3.11
BBB_MMC1_DAT3: BBB_DOWN.52 BBB_PINOUT3.10
BBB_MMC1_DAT4: BBB_DOWN.69 BBB_PINOUT2.14
BBB_MMC1_DAT5: BBB_DOWN.68 BBB_PINOUT2.15
BBB_MMC1_DAT6: BBB_DOWN.49 BBB_PINOUT3.13
BBB_MMC1_DAT7: BBB_DOWN.50 BBB_PINOUT3.12
BBB_PWR_BUT: BBB_DOWN.9 BBB_PINOUT1.14
BBB_SYS_5V: BBB_DOWN.7 BBB_DOWN.8 BBB_PINOUT1.15 BBB_PINOUT1.16
BBB_SYS_RST: BBB_DOWN.10 BBB_PINOUT1.13
BBB_UART4_RXD: BBB_DOWN.11 BBB_PINOUT1.12
BBB_UART4_TXD: BBB_DOWN.13
BBB_VDD_3V3: BBB_DOWN.3 BBB_DOWN.4 BBB_PINOUT1.19 BBB_PINOUT1.20
BBB_VDD_5V: BBB_DOWN.5 BBB_DOWN.6 BBB_PINOUT1.17 BBB_PINOUT1.18
BBB_VDD_ADC: BBB_DOWN.32 BBB_PINOUT1.4
COUNTER_CLK0: DUT1_U_DUT_HEADER4.24 ETH4.35
COUNTER_CLK1: DUT1_U_DUT_HEADER3.24 ETH4.25
COUNTER_CLK2: DUT1_U_DUT_HEADER2.24 ETH4.22
COUNTER_CLK3: DUT1_U_DUT_HEADER1.24 ETH4.21
COUNTER_CLR: DUT1_U_DUT_HEADER4.23 ETH4.36
CUSTOM_HIGH: 1uF_1_U_Power_Control2.2 250Ohm_U_Power_Control2.2 CUSTOM_HIGH.1 D1_U_Power_Control2.1 D2_U_Power_Control2.2 VR1_U_Power_Control2.2 VR1_U_Power_Control2.4
CUSTOM_LOW: 1uF_1_U_Power_Control1.2 250Ohm_U_Power_Control1.2 CUSTOM_LOW.1 D1_U_Power_Control1.1 D2_U_Power_Control1.2 VR1_U_Power_Control1.2 VR1_U_Power_Control1.4
DIN0: BBB_DOWN.21 POT_U_Power_Control2.10
DIN1: BBB_DOWN.29 POT_U_Power_Control1.10
DUT_HIGH_BACKUP: CUSTOM_HIGH.3 DUT_HIGH_BACKUP.2 DUT_HIGH_BACKUP.3
EN: DUT1_U_DUT_HEADER4.22 ETH4.37 LT1_U_VT_WRP1.10 LT1_U_VT_WRP2.10 LT1_U_VT_WRP3.10 LT1_U_VT_WRP4.10 LT1_U_VT_WRP5.10 LT1_U_VT_WRP6.10 LT1_U_VT_WRP7.10 LT1_U_VT_WRP8.10 LT2_U_VT_WRP1.10 LT2_U_VT_WRP2.10 LT2_U_VT_WRP3.10 LT2_U_VT_WRP4.10 LT2_U_VT_WRP5.10 LT2_U_VT_WRP6.10 LT2_U_VT_WRP7.10 LT2_U_VT_WRP8.10
FPGA_Q: DUT1_U_DUT_HEADER3.20 ETH4.18
FPGA_RX: BBB_DOWN.26 ETH4.16
FPGA_SHCP: DUT1_U_DUT_HEADER3.22 ETH4.29
FPGA_STCP: DUT1_U_DUT_HEADER3.23 ETH4.28
FPGA_TX: BBB_DOWN.24 ETH4.17
FPGA_~CS1: DUT1_U_DUT_HEADER4.17 ETH4.40
FPGA_~CS2: DUT1_U_DUT_HEADER2.17 ETH4.27
FPGA_~CS3: DUT1_U_DUT_HEADER1.17 ETH4.24
FPGA_~CS4: DUT1_U_DUT_HEADER3.17 ETH4.34
FPGA_~MR: DUT1_U_DUT_HEADER3.19 ETH4.32
FPGA_~OE: DUT1_U_DUT_HEADER4.18 ETH4.39
FPGA_~PL: DUT1_U_DUT_HEADER3.21 ETH4.31
FPGA_~WE1: DUT1_U_DUT_HEADER4.19 ETH4.38
FPGA_~WE2: DUT1_U_DUT_HEADER2.18 ETH4.26
FPGA_~WE3: DUT1_U_DUT_HEADER1.18 ETH4.23
FPGA_~WE4: DUT1_U_DUT_HEADER3.18 ETH4.33
GLOBAL_3V3: 0.1uF_0_U_VT_WRP1.1 0.1uF_0_U_VT_WRP2.1 0.1uF_0_U_VT_WRP3.1 0.1uF_0_U_VT_WRP4.1 0.1uF_0_U_VT_WRP5.1 0.1uF_0_U_VT_WRP6.1 0.1uF_0_U_VT_WRP7.1 0.1uF_0_U_VT_WRP8.1 0.1uF_1_U_VT_WRP1.1 0.1uF_1_U_VT_WRP2.1 0.1uF_1_U_VT_WRP3.1 0.1uF_1_U_VT_WRP4.1 0.1uF_1_U_VT_WRP5.1 0.1uF_1_U_VT_WRP6.1 0.1uF_1_U_VT_WRP7.1 0.1uF_1_U_VT_WRP8.1 1uF_4_U_Power_Control1.2 1uF_4_U_Power_Control2.2 3V3.2 3V3.3 10uF_1_U_Power_Control1.2 10uF_1_U_Power_Control2.2 DUT1_U_DUT_HEADER2.19 LT1_U_VT_WRP1.2 LT1_U_VT_WRP2.2 LT1_U_VT_WRP3.2 LT1_U_VT_WRP4.2 LT1_U_VT_WRP5.2 LT1_U_VT_WRP6.2 LT1_U_VT_WRP7.2 LT1_U_VT_WRP8.2 LT2_U_VT_WRP1.2 LT2_U_VT_WRP2.2 LT2_U_VT_WRP3.2 LT2_U_VT_WRP4.2 LT2_U_VT_WRP5.2 LT2_U_VT_WRP6.2 LT2_U_VT_WRP7.2 LT2_U_VT_WRP8.2 POT_U_Power_Control1.8 POT_U_Power_Control2.8 S1.1
GLOBAL_HIGH_POWER: 0.1uF_3_U_VT_WRP1.1 0.1uF_3_U_VT_WRP2.1 0.1uF_3_U_VT_WRP3.1 0.1uF_3_U_VT_WRP4.1 0.1uF_3_U_VT_WRP5.1 0.1uF_3_U_VT_WRP6.1 0.1uF_3_U_VT_WRP7.1 0.1uF_3_U_VT_WRP8.1 0.1uF_4_U_VT_WRP1.1 0.1uF_4_U_VT_WRP2.1 0.1uF_4_U_VT_WRP3.1 0.1uF_4_U_VT_WRP4.1 0.1uF_4_U_VT_WRP5.1 0.1uF_4_U_VT_WRP6.1 0.1uF_4_U_VT_WRP7.1 0.1uF_4_U_VT_WRP8.1 CUSTOM_HIGH.2 DUT1_U_DUT_HEADER2.23 LOGIC_HIGH.1 LOGIC_HIGH.2 LOGIC_HIGH.3 LOGIC_HIGH.4 LOGIC_HIGH.5 LOGIC_HIGH.6 LOGIC_HIGH.7 LOGIC_HIGH.8 LOGIC_HIGH.9 LOGIC_HIGH.10 LT1_U_VT_WRP1.19 LT1_U_VT_WRP2.19 LT1_U_VT_WRP3.19 LT1_U_VT_WRP4.19 LT1_U_VT_WRP5.19 LT1_U_VT_WRP6.19 LT1_U_VT_WRP7.19 LT1_U_VT_WRP8.19 LT2_U_VT_WRP1.19 LT2_U_VT_WRP2.19 LT2_U_VT_WRP3.19 LT2_U_VT_WRP4.19 LT2_U_VT_WRP5.19 LT2_U_VT_WRP6.19 LT2_U_VT_WRP7.19 LT2_U_VT_WRP8.19
GLOBAL_LOW_POWER: 0.1uF_0_U_VT_WRP1.2 0.1uF_0_U_VT_WRP2.2 0.1uF_0_U_VT_WRP3.2 0.1uF_0_U_VT_WRP4.2 0.1uF_0_U_VT_WRP5.2 0.1uF_0_U_VT_WRP6.2 0.1uF_0_U_VT_WRP7.2 0.1uF_0_U_VT_WRP8.2 0.1uF_1_U_VT_WRP1.2 0.1uF_1_U_VT_WRP2.2 0.1uF_1_U_VT_WRP3.2 0.1uF_1_U_VT_WRP4.2 0.1uF_1_U_VT_WRP5.2 0.1uF_1_U_VT_WRP6.2 0.1uF_1_U_VT_WRP7.2 0.1uF_1_U_VT_WRP8.2 0.1uF_3_U_VT_WRP1.2 0.1uF_3_U_VT_WRP2.2 0.1uF_3_U_VT_WRP3.2 0.1uF_3_U_VT_WRP4.2 0.1uF_3_U_VT_WRP5.2 0.1uF_3_U_VT_WRP6.2 0.1uF_3_U_VT_WRP7.2 0.1uF_3_U_VT_WRP8.2 0.1uF_4_U_VT_WRP1.2 0.1uF_4_U_VT_WRP2.2 0.1uF_4_U_VT_WRP3.2 0.1uF_4_U_VT_WRP4.2 0.1uF_4_U_VT_WRP5.2 0.1uF_4_U_VT_WRP6.2 0.1uF_4_U_VT_WRP7.2 0.1uF_4_U_VT_WRP8.2 CUSTOM_LOW.2 LOGIC_LOW.1 LOGIC_LOW.2 LOGIC_LOW.3 LOGIC_LOW.4 LOGIC_LOW.5 LOGIC_LOW.6 LOGIC_LOW.7 LOGIC_LOW.8 LOGIC_LOW.9 LOGIC_LOW.10 LT1_U_VT_WRP1.11 LT1_U_VT_WRP2.11 LT1_U_VT_WRP3.11 LT1_U_VT_WRP4.11 LT1_U_VT_WRP5.11 LT1_U_VT_WRP6.11 LT1_U_VT_WRP7.11 LT1_U_VT_WRP8.11 LT2_U_VT_WRP1.11 LT2_U_VT_WRP2.11 LT2_U_VT_WRP3.11 LT2_U_VT_WRP4.11 LT2_U_VT_WRP5.11 LT2_U_VT_WRP6.11 LT2_U_VT_WRP7.11 LT2_U_VT_WRP8.11
GND: 1MOhm_U_Power_Control1.1 1MOhm_U_Power_Control2.1 1uF_3_U_Power_Control1.1 1uF_3_U_Power_Control2.1 1uF_4_U_Power_Control1.1 1uF_4_U_Power_Control2.1 1uF_5_U_Power_Control1.1 1uF_5_U_Power_Control2.1 3V3.1 5V.2 5V.3 7MOhm_U_Power_Control1.1 7MOhm_U_Power_Control2.1 10uF_1_U_Power_Control1.1 10uF_1_U_Power_Control2.1 10uF_2_U_Power_Control1.1 10uF_2_U_Power_Control2.1 12V.1 BBB_DOWN.1 BBB_DOWN.2 BBB_DOWN.43 BBB_DOWN.44 BBB_DOWN.45 BBB_DOWN.46 BBB_DOWN.47 BBB_DOWN.48 BBB_PINOUT2.1 BBB_PINOUT2.2 BBB_PINOUT2.3 BBB_PINOUT2.4 BBB_PINOUT2.5 BBB_PINOUT2.6 BBB_PINOUT2.7 BBB_PINOUT2.8 BBB_PINOUT2.9 BBB_PINOUT2.10 CUSTOM_LOW.3 DUT1_U_DUT_HEADER1.19 DUT1_U_DUT_HEADER1.20 DUT1_U_DUT_HEADER1.21 DUT1_U_DUT_HEADER1.22 DUT1_U_DUT_HEADER1.23 DUT1_U_DUT_HEADER2.20 DUT1_U_DUT_HEADER2.21 DUT1_U_DUT_HEADER2.22 DUT1_U_DUT_HEADER4.20 DUT1_U_DUT_HEADER4.21 DUT_HIGH_BACKUP.1 ETH3.17 ETH3.18 ETH3.19 ETH3.20 ETH3.21 ETH3.22 ETH3.23 ETH3.24 ETH4.11 ETH4.30 GND1.1 GND1.2 GND1.3 GND1.4 GND1.5 GND1.6 GND1.7 GND1.8 GND1.9 GND1.10 GND2.1 GND2.2 GND2.3 GND2.4 GND2.5 GND2.6 GND2.7 GND2.8 GND2.9 GND2.10 LM2_U_Power_Control1.2 LM2_U_Power_Control2.2 POT_U_Power_Control1.2 POT_U_Power_Control1.9 POT_U_Power_Control2.2 POT_U_Power_Control2.9 R1.1
IVL_B0: ETH1.1 LT1_U_VT_WRP8.1
IVL_B1: ETH1.2 LT1_U_VT_WRP8.3
IVL_B2: ETH1.3 LT1_U_VT_WRP8.4
IVL_B3: ETH1.4 LT1_U_VT_WRP8.5
IVL_B4: ETH1.5 LT1_U_VT_WRP8.6
IVL_B5: ETH1.6 LT1_U_VT_WRP8.7
IVL_B6: ETH1.7 LT1_U_VT_WRP8.8
IVL_B7: ETH1.8 LT1_U_VT_WRP8.9
IVL_B8: ETH1.9 LT2_U_VT_WRP8.1
IVL_B9: ETH1.10 LT2_U_VT_WRP8.3
IVL_B10: ETH1.11 LT2_U_VT_WRP8.4
IVL_B11: ETH1.12 LT2_U_VT_WRP8.5
IVL_B12: ETH1.13 LT2_U_VT_WRP8.6
IVL_B13: ETH1.14 LT2_U_VT_WRP8.7
IVL_B14: ETH1.15 LT2_U_VT_WRP8.8
IVL_B15: ETH1.16 LT2_U_VT_WRP8.9
IVL_B16: ETH1.17 LT1_U_VT_WRP7.1
IVL_B17: ETH1.18 LT1_U_VT_WRP7.3
IVL_B18: ETH1.19 LT1_U_VT_WRP7.4
IVL_B19: ETH1.20 LT1_U_VT_WRP7.5
IVL_B20: ETH1.21 LT1_U_VT_WRP7.6
IVL_B21: ETH1.22 LT1_U_VT_WRP7.7
IVL_B22: ETH1.23 LT1_U_VT_WRP7.8
IVL_B23: ETH1.24 LT1_U_VT_WRP7.9
IVL_B24: ETH1.25 LT2_U_VT_WRP7.1
IVL_B25: ETH1.26 LT2_U_VT_WRP7.3
IVL_B26: ETH1.27 LT2_U_VT_WRP7.4
IVL_B27: ETH1.28 LT2_U_VT_WRP7.5
IVL_B28: ETH1.29 LT2_U_VT_WRP7.6
IVL_B29: ETH1.30 LT2_U_VT_WRP7.7
IVL_B30: ETH1.31 LT2_U_VT_WRP7.8
IVL_B31: ETH1.32 LT2_U_VT_WRP7.9
IVL_B32: ETH1.33 LT1_U_VT_WRP6.1
IVL_B33: ETH1.34 LT1_U_VT_WRP6.3
IVL_B34: ETH1.35 LT1_U_VT_WRP6.4
IVL_B35: ETH1.36 LT1_U_VT_WRP6.5
IVL_B36: ETH1.37 LT1_U_VT_WRP6.6
IVL_B37: ETH1.38 LT1_U_VT_WRP6.7
IVL_B38: ETH1.39 LT1_U_VT_WRP6.8
IVL_B39: ETH1.40 LT1_U_VT_WRP6.9
IVL_B40: ETH2.1 LT2_U_VT_WRP6.1
IVL_B41: ETH2.2 LT2_U_VT_WRP6.3
IVL_B42: ETH2.3 LT2_U_VT_WRP6.4
IVL_B43: ETH2.4 LT2_U_VT_WRP6.5
IVL_B44: ETH2.5 LT2_U_VT_WRP6.6
IVL_B45: ETH2.6 LT2_U_VT_WRP6.7
IVL_B46: ETH2.7 LT2_U_VT_WRP6.8
IVL_B47: ETH2.8 LT2_U_VT_WRP6.9
IVL_B48: ETH2.9 LT1_U_VT_WRP5.1
IVL_B49: ETH2.10 LT1_U_VT_WRP5.3
IVL_B50: ETH2.11 LT1_U_VT_WRP5.4
IVL_B51: ETH2.12 LT1_U_VT_WRP5.5
IVL_B52: ETH2.13 LT1_U_VT_WRP5.6
IVL_B53: ETH2.14 LT1_U_VT_WRP5.7
IVL_B54: ETH2.15 LT1_U_VT_WRP5.8
IVL_B55: ETH2.16 LT1_U_VT_WRP5.9
IVL_B56: ETH2.17 LT2_U_VT_WRP5.1
IVL_B57: ETH2.18 LT2_U_VT_WRP5.3
IVL_B58: ETH2.19 LT2_U_VT_WRP5.4
IVL_B59: ETH2.20 LT2_U_VT_WRP5.5
IVL_B60: ETH2.21 LT2_U_VT_WRP5.6
IVL_B61: ETH2.22 LT2_U_VT_WRP5.7
IVL_B62: ETH2.23 LT2_U_VT_WRP5.8
IVL_B63: ETH2.24 LT2_U_VT_WRP5.9
IVL_B64: ETH2.25 LT1_U_VT_WRP4.1
IVL_B65: ETH2.26 LT1_U_VT_WRP4.3
IVL_B66: ETH2.27 LT1_U_VT_WRP4.4
IVL_B67: ETH2.28 LT1_U_VT_WRP4.5
IVL_B68: ETH2.29 LT1_U_VT_WRP4.6
IVL_B69: ETH2.30 LT1_U_VT_WRP4.7
IVL_B70: ETH2.31 LT1_U_VT_WRP4.8
IVL_B71: ETH2.32 LT1_U_VT_WRP4.9
IVL_B72: ETH2.33 LT2_U_VT_WRP4.1
IVL_B73: ETH2.34 LT2_U_VT_WRP4.3
IVL_B74: ETH2.35 LT2_U_VT_WRP4.4
IVL_B75: ETH2.36 LT2_U_VT_WRP4.5
IVL_B76: ETH2.37 LT2_U_VT_WRP4.6
IVL_B77: ETH2.38 LT2_U_VT_WRP4.7
IVL_B78: ETH2.39 LT2_U_VT_WRP4.8
IVL_B79: ETH2.40 LT2_U_VT_WRP4.9
IVL_B80: ETH3.1 LT1_U_VT_WRP3.1
IVL_B81: ETH3.2 LT1_U_VT_WRP3.3
IVL_B82: ETH3.3 LT1_U_VT_WRP3.4
IVL_B83: ETH3.4 LT1_U_VT_WRP3.5
IVL_B84: ETH3.5 LT1_U_VT_WRP3.6
IVL_B85: ETH3.6 LT1_U_VT_WRP3.7
IVL_B86: ETH3.7 LT1_U_VT_WRP3.8
IVL_B87: ETH3.8 LT1_U_VT_WRP3.9
IVL_B88: ETH3.9 LT2_U_VT_WRP3.1
IVL_B89: ETH3.10 LT2_U_VT_WRP3.3
IVL_B90: ETH3.11 LT2_U_VT_WRP3.4
IVL_B91: ETH3.12 LT2_U_VT_WRP3.5
IVL_B92: ETH3.13 LT2_U_VT_WRP3.6
IVL_B93: ETH3.14 LT2_U_VT_WRP3.7
IVL_B94: ETH3.15 LT2_U_VT_WRP3.8
IVL_B95: ETH3.16 LT2_U_VT_WRP3.9
IVL_B96: ETH3.25 LT1_U_VT_WRP2.1
IVL_B97: ETH3.26 LT1_U_VT_WRP2.3
IVL_B98: ETH3.27 LT1_U_VT_WRP2.4
IVL_B99: ETH3.28 LT1_U_VT_WRP2.5
IVL_B100: ETH3.29 LT1_U_VT_WRP2.6
IVL_B101: ETH3.30 LT1_U_VT_WRP2.7
IVL_B102: ETH3.31 LT1_U_VT_WRP2.8
IVL_B103: ETH3.32 LT1_U_VT_WRP2.9
IVL_B104: ETH3.33 LT2_U_VT_WRP2.1
IVL_B105: ETH3.34 LT2_U_VT_WRP2.3
IVL_B106: ETH3.35 LT2_U_VT_WRP2.4
IVL_B107: ETH3.36 LT2_U_VT_WRP2.5
IVL_B108: ETH3.37 LT2_U_VT_WRP2.6
IVL_B109: ETH3.38 LT2_U_VT_WRP2.7
IVL_B110: ETH3.39 LT2_U_VT_WRP2.8
IVL_B111: ETH3.40 LT2_U_VT_WRP2.9
IVL_B112: ETH4.1 LT1_U_VT_WRP1.1
IVL_B113: ETH4.2 LT1_U_VT_WRP1.3
IVL_B114: ETH4.3 LT1_U_VT_WRP1.4
IVL_B115: ETH4.4 LT1_U_VT_WRP1.5
IVL_B116: ETH4.5 LT1_U_VT_WRP1.6
IVL_B117: ETH4.6 LT1_U_VT_WRP1.7
IVL_B118: ETH4.7 LT1_U_VT_WRP1.8
IVL_B119: ETH4.8 LT1_U_VT_WRP1.9
IVL_B120: ETH4.9 LT2_U_VT_WRP1.1
IVL_B121: ETH4.10 LT2_U_VT_WRP1.3
IVL_B122: ETH4.12 LT2_U_VT_WRP1.4
IVL_B123: ETH4.13 LT2_U_VT_WRP1.5
IVL_B124: ETH4.14 LT2_U_VT_WRP1.6
IVL_B125: ETH4.15 LT2_U_VT_WRP1.7
IVL_B126: LT2_U_VT_WRP1.8
IVL_B127: LT2_U_VT_WRP1.9
Net1MOhm_U_Power_Control1_2: 1MOhm_U_Power_Control1.2 3MOhm_U_Power_Control1.1 LM1_U_Power_Control1.1
Net1MOhm_U_Power_Control2_2: 1MOhm_U_Power_Control2.2 3MOhm_U_Power_Control2.1 LM1_U_Power_Control2.1
Net1uF_2_U_Power_Control1_2: 1uF_2_U_Power_Control1.2 250Ohm_U_Power_Control1.1 D2_U_Power_Control1.1 POT_U_Power_Control1.4 VR1_U_Power_Control1.1
Net1uF_2_U_Power_Control2_2: 1uF_2_U_Power_Control2.2 250Ohm_U_Power_Control2.1 D2_U_Power_Control2.1 POT_U_Power_Control2.4 VR1_U_Power_Control2.1
Net1uF_3_U_Power_Control1_2: 1uF_3_U_Power_Control1.2 POT_U_Power_Control1.7
Net1uF_3_U_Power_Control2_2: 1uF_3_U_Power_Control2.2 POT_U_Power_Control2.7
Net5MOhm_U_Power_Control1_1: 5MOhm_U_Power_Control1.1 7MOhm_U_Power_Control1.2 LM2_U_Power_Control1.1
Net5MOhm_U_Power_Control2_1: 5MOhm_U_Power_Control2.1 7MOhm_U_Power_Control2.2 LM2_U_Power_Control2.1
OTHER_W20: ETH4.20
OTHER_W21: ETH4.19 R1.2 S1.2
OUT1_U_Power_Control1: 1uF_1_U_Power_Control1.1 1uF_2_U_Power_Control1.1 LM1_U_Power_Control1.3 LM1_U_Power_Control1.4 POT_U_Power_Control1.3
OUT1_U_Power_Control2: 1uF_1_U_Power_Control2.1 1uF_2_U_Power_Control2.1 LM1_U_Power_Control2.3 LM1_U_Power_Control2.4 POT_U_Power_Control2.3
OUT2_U_Power_Control1: D1_U_Power_Control1.2 LM1_U_Power_Control1.5 LM2_U_Power_Control1.3 LM2_U_Power_Control1.4 VR1_U_Power_Control1.3
OUT2_U_Power_Control2: D1_U_Power_Control2.2 LM1_U_Power_Control2.5 LM2_U_Power_Control2.3 LM2_U_Power_Control2.4 VR1_U_Power_Control2.3
OVCC_B0: DUT1_U_DUT_HEADER4.1 LT1_U_VT_WRP8.20
OVCC_B1: DUT1_U_DUT_HEADER4.2 LT1_U_VT_WRP8.18
OVCC_B2: DUT1_U_DUT_HEADER4.3 LT1_U_VT_WRP8.17
OVCC_B3: DUT1_U_DUT_HEADER4.4 LT1_U_VT_WRP8.16
OVCC_B4: DUT1_U_DUT_HEADER4.5 LT1_U_VT_WRP8.15
OVCC_B5: DUT1_U_DUT_HEADER4.6 LT1_U_VT_WRP8.14
OVCC_B6: DUT1_U_DUT_HEADER4.7 LT1_U_VT_WRP8.13
OVCC_B7: DUT1_U_DUT_HEADER4.8 LT1_U_VT_WRP8.12
OVCC_B8: DUT1_U_DUT_HEADER4.9 LT2_U_VT_WRP8.20
OVCC_B9: DUT1_U_DUT_HEADER4.10 LT2_U_VT_WRP8.18
OVCC_B10: DUT1_U_DUT_HEADER4.11 LT2_U_VT_WRP8.17
OVCC_B11: DUT1_U_DUT_HEADER4.12 LT2_U_VT_WRP8.16
OVCC_B12: DUT1_U_DUT_HEADER4.13 LT2_U_VT_WRP8.15
OVCC_B13: DUT1_U_DUT_HEADER4.14 LT2_U_VT_WRP8.14
OVCC_B14: DUT1_U_DUT_HEADER4.15 LT2_U_VT_WRP8.13
OVCC_B15: DUT1_U_DUT_HEADER4.16 LT2_U_VT_WRP8.12
OVCC_B16: DUT1_U_DUT_HEADER4.25 LT1_U_VT_WRP7.20
OVCC_B17: DUT1_U_DUT_HEADER4.26 LT1_U_VT_WRP7.18
OVCC_B18: DUT1_U_DUT_HEADER4.27 LT1_U_VT_WRP7.17
OVCC_B19: DUT1_U_DUT_HEADER4.28 LT1_U_VT_WRP7.16
OVCC_B20: DUT1_U_DUT_HEADER4.29 LT1_U_VT_WRP7.15
OVCC_B21: DUT1_U_DUT_HEADER4.30 LT1_U_VT_WRP7.14
OVCC_B22: DUT1_U_DUT_HEADER4.31 LT1_U_VT_WRP7.13
OVCC_B23: DUT1_U_DUT_HEADER4.32 LT1_U_VT_WRP7.12
OVCC_B24: DUT1_U_DUT_HEADER4.33 LT2_U_VT_WRP7.20
OVCC_B25: DUT1_U_DUT_HEADER4.34 LT2_U_VT_WRP7.18
OVCC_B26: DUT1_U_DUT_HEADER4.35 LT2_U_VT_WRP7.17
OVCC_B27: DUT1_U_DUT_HEADER4.36 LT2_U_VT_WRP7.16
OVCC_B28: DUT1_U_DUT_HEADER4.37 LT2_U_VT_WRP7.15
OVCC_B29: DUT1_U_DUT_HEADER4.38 LT2_U_VT_WRP7.14
OVCC_B30: DUT1_U_DUT_HEADER4.39 LT2_U_VT_WRP7.13
OVCC_B31: DUT1_U_DUT_HEADER4.40 LT2_U_VT_WRP7.12
OVCC_B32: DUT1_U_DUT_HEADER3.1 LT1_U_VT_WRP6.20
OVCC_B33: DUT1_U_DUT_HEADER3.2 LT1_U_VT_WRP6.18
OVCC_B34: DUT1_U_DUT_HEADER3.3 LT1_U_VT_WRP6.17
OVCC_B35: DUT1_U_DUT_HEADER3.4 LT1_U_VT_WRP6.16
OVCC_B36: DUT1_U_DUT_HEADER3.5 LT1_U_VT_WRP6.15
OVCC_B37: DUT1_U_DUT_HEADER3.6 LT1_U_VT_WRP6.14
OVCC_B38: DUT1_U_DUT_HEADER3.7 LT1_U_VT_WRP6.13
OVCC_B39: DUT1_U_DUT_HEADER3.8 LT1_U_VT_WRP6.12
OVCC_B40: DUT1_U_DUT_HEADER3.9 LT2_U_VT_WRP6.20
OVCC_B41: DUT1_U_DUT_HEADER3.10 LT2_U_VT_WRP6.18
OVCC_B42: DUT1_U_DUT_HEADER3.11 LT2_U_VT_WRP6.17
OVCC_B43: DUT1_U_DUT_HEADER3.12 LT2_U_VT_WRP6.16
OVCC_B44: DUT1_U_DUT_HEADER3.13 LT2_U_VT_WRP6.15
OVCC_B45: DUT1_U_DUT_HEADER3.14 LT2_U_VT_WRP6.14
OVCC_B46: DUT1_U_DUT_HEADER3.15 LT2_U_VT_WRP6.13
OVCC_B47: DUT1_U_DUT_HEADER3.16 LT2_U_VT_WRP6.12
OVCC_B48: DUT1_U_DUT_HEADER3.25 LT1_U_VT_WRP5.20
OVCC_B49: DUT1_U_DUT_HEADER3.26 LT1_U_VT_WRP5.18
OVCC_B50: DUT1_U_DUT_HEADER3.27 LT1_U_VT_WRP5.17
OVCC_B51: DUT1_U_DUT_HEADER3.28 LT1_U_VT_WRP5.16
OVCC_B52: DUT1_U_DUT_HEADER3.29 LT1_U_VT_WRP5.15
OVCC_B53: DUT1_U_DUT_HEADER3.30 LT1_U_VT_WRP5.14
OVCC_B54: DUT1_U_DUT_HEADER3.31 LT1_U_VT_WRP5.13
OVCC_B55: DUT1_U_DUT_HEADER3.32 LT1_U_VT_WRP5.12
OVCC_B56: DUT1_U_DUT_HEADER3.33 LT2_U_VT_WRP5.20
OVCC_B57: DUT1_U_DUT_HEADER3.34 LT2_U_VT_WRP5.18
OVCC_B58: DUT1_U_DUT_HEADER3.35 LT2_U_VT_WRP5.17
OVCC_B59: DUT1_U_DUT_HEADER3.36 LT2_U_VT_WRP5.16
OVCC_B60: DUT1_U_DUT_HEADER3.37 LT2_U_VT_WRP5.15
OVCC_B61: DUT1_U_DUT_HEADER3.38 LT2_U_VT_WRP5.14
OVCC_B62: DUT1_U_DUT_HEADER3.39 LT2_U_VT_WRP5.13
OVCC_B63: DUT1_U_DUT_HEADER3.40 LT2_U_VT_WRP5.12
OVCC_B64: DUT1_U_DUT_HEADER2.1 LT1_U_VT_WRP4.20
OVCC_B65: DUT1_U_DUT_HEADER2.2 LT1_U_VT_WRP4.18
OVCC_B66: DUT1_U_DUT_HEADER2.3 LT1_U_VT_WRP4.17
OVCC_B67: DUT1_U_DUT_HEADER2.4 LT1_U_VT_WRP4.16
OVCC_B68: DUT1_U_DUT_HEADER2.5 LT1_U_VT_WRP4.15
OVCC_B69: DUT1_U_DUT_HEADER2.6 LT1_U_VT_WRP4.14
OVCC_B70: DUT1_U_DUT_HEADER2.7 LT1_U_VT_WRP4.13
OVCC_B71: DUT1_U_DUT_HEADER2.8 LT1_U_VT_WRP4.12
OVCC_B72: DUT1_U_DUT_HEADER2.9 LT2_U_VT_WRP4.20
OVCC_B73: DUT1_U_DUT_HEADER2.10 LT2_U_VT_WRP4.18
OVCC_B74: DUT1_U_DUT_HEADER2.11 LT2_U_VT_WRP4.17
OVCC_B75: DUT1_U_DUT_HEADER2.12 LT2_U_VT_WRP4.16
OVCC_B76: DUT1_U_DUT_HEADER2.13 LT2_U_VT_WRP4.15
OVCC_B77: DUT1_U_DUT_HEADER2.14 LT2_U_VT_WRP4.14
OVCC_B78: DUT1_U_DUT_HEADER2.15 LT2_U_VT_WRP4.13
OVCC_B79: DUT1_U_DUT_HEADER2.16 LT2_U_VT_WRP4.12
OVCC_B80: DUT1_U_DUT_HEADER2.25 LT1_U_VT_WRP3.20
OVCC_B81: DUT1_U_DUT_HEADER2.26 LT1_U_VT_WRP3.18
OVCC_B82: DUT1_U_DUT_HEADER2.27 LT1_U_VT_WRP3.17
OVCC_B83: DUT1_U_DUT_HEADER2.28 LT1_U_VT_WRP3.16
OVCC_B84: DUT1_U_DUT_HEADER2.29 LT1_U_VT_WRP3.15
OVCC_B85: DUT1_U_DUT_HEADER2.30 LT1_U_VT_WRP3.14
OVCC_B86: DUT1_U_DUT_HEADER2.31 LT1_U_VT_WRP3.13
OVCC_B87: DUT1_U_DUT_HEADER2.32 LT1_U_VT_WRP3.12
OVCC_B88: DUT1_U_DUT_HEADER2.33 LT2_U_VT_WRP3.20
OVCC_B89: DUT1_U_DUT_HEADER2.34 LT2_U_VT_WRP3.18
OVCC_B90: DUT1_U_DUT_HEADER2.35 LT2_U_VT_WRP3.17
OVCC_B91: DUT1_U_DUT_HEADER2.36 LT2_U_VT_WRP3.16
OVCC_B92: DUT1_U_DUT_HEADER2.37 LT2_U_VT_WRP3.15
OVCC_B93: DUT1_U_DUT_HEADER2.38 LT2_U_VT_WRP3.14
OVCC_B94: DUT1_U_DUT_HEADER2.39 LT2_U_VT_WRP3.13
OVCC_B95: DUT1_U_DUT_HEADER2.40 LT2_U_VT_WRP3.12
OVCC_B96: DUT1_U_DUT_HEADER1.1 LT1_U_VT_WRP2.20
OVCC_B97: DUT1_U_DUT_HEADER1.2 LT1_U_VT_WRP2.18
OVCC_B98: DUT1_U_DUT_HEADER1.3 LT1_U_VT_WRP2.17
OVCC_B99: DUT1_U_DUT_HEADER1.4 LT1_U_VT_WRP2.16
OVCC_B100: DUT1_U_DUT_HEADER1.5 LT1_U_VT_WRP2.15
OVCC_B101: DUT1_U_DUT_HEADER1.6 LT1_U_VT_WRP2.14
OVCC_B102: DUT1_U_DUT_HEADER1.7 LT1_U_VT_WRP2.13
OVCC_B103: DUT1_U_DUT_HEADER1.8 LT1_U_VT_WRP2.12
OVCC_B104: DUT1_U_DUT_HEADER1.9 LT2_U_VT_WRP2.20
OVCC_B105: DUT1_U_DUT_HEADER1.10 LT2_U_VT_WRP2.18
OVCC_B106: DUT1_U_DUT_HEADER1.11 LT2_U_VT_WRP2.17
OVCC_B107: DUT1_U_DUT_HEADER1.12 LT2_U_VT_WRP2.16
OVCC_B108: DUT1_U_DUT_HEADER1.13 LT2_U_VT_WRP2.15
OVCC_B109: DUT1_U_DUT_HEADER1.14 LT2_U_VT_WRP2.14
OVCC_B110: DUT1_U_DUT_HEADER1.15 LT2_U_VT_WRP2.13
OVCC_B111: DUT1_U_DUT_HEADER1.16 LT2_U_VT_WRP2.12
OVCC_B112: DUT1_U_DUT_HEADER1.25 LT1_U_VT_WRP1.20
OVCC_B113: DUT1_U_DUT_HEADER1.26 LT1_U_VT_WRP1.18
OVCC_B114: DUT1_U_DUT_HEADER1.27 LT1_U_VT_WRP1.17
OVCC_B115: DUT1_U_DUT_HEADER1.28 LT1_U_VT_WRP1.16
OVCC_B116: DUT1_U_DUT_HEADER1.29 LT1_U_VT_WRP1.15
OVCC_B117: DUT1_U_DUT_HEADER1.30 LT1_U_VT_WRP1.14
OVCC_B118: DUT1_U_DUT_HEADER1.31 LT1_U_VT_WRP1.13
OVCC_B119: DUT1_U_DUT_HEADER1.32 LT1_U_VT_WRP1.12
OVCC_B120: DUT1_U_DUT_HEADER1.33 LT2_U_VT_WRP1.20
OVCC_B121: DUT1_U_DUT_HEADER1.34 LT2_U_VT_WRP1.18
OVCC_B122: DUT1_U_DUT_HEADER1.35 LT2_U_VT_WRP1.17
OVCC_B123: DUT1_U_DUT_HEADER1.36 LT2_U_VT_WRP1.16
OVCC_B124: DUT1_U_DUT_HEADER1.37 LT2_U_VT_WRP1.15
OVCC_B125: DUT1_U_DUT_HEADER1.38 LT2_U_VT_WRP1.14
OVCC_B126: DUT1_U_DUT_HEADER1.39 LT2_U_VT_WRP1.13
OVCC_B127: DUT1_U_DUT_HEADER1.40 LT2_U_VT_WRP1.12
RDY0: BBB_DOWN.15 POT_U_Power_Control2.14
RDY1: BBB_DOWN.23 POT_U_Power_Control1.14
SCLK_W_U_Power_Control1: POT_U_Power_Control1.11
SCLK_W_U_Power_Control2: BBB_DOWN.22 POT_U_Power_Control2.11
SDO_W_U_Power_Control1: BBB_DOWN.30 POT_U_Power_Control1.13
SDO_W_U_Power_Control2: BBB_DOWN.18 POT_U_Power_Control2.13
SPI1CLK: BBB_DOWN.31
SPICS0: BBB_DOWN.17 POT_U_Power_Control2.12
SPICS1: BBB_DOWN.28 POT_U_Power_Control1.12
V_RST: BBB_DOWN.12 POT_U_Power_Control1.1 POT_U_Power_Control2.1
pads on no net: 3V3.H 5V.H 12V.H DUT_HIGH_BACKUP.H POT_U_Power_Control1.5 POT_U_Power_Control2.5

## Silkscreen, mask and mechanical layers (free items; w line width, h text height)
Top Overlay:
  lines w10: 4297,4074 4297,4124 4398,4124 4398,4075 ; 4299,474 4299,524 4400,524 4400,475 ; 4400,3927 4400,3878 4501,3878 4501,3928 ; 4402,327 4402,278 4503,278 4503,328
  text "THIS SIDE NEAR NUMATO USB PORT" at 7588,4796 h60
  text "0.1 uF | 0603" at 6165,4625 h100
  text "0.1 uF | 0603" at 10065,4625 h100
  text "10uF" at 3935,4175 h60
  text "10uF" at 5421,4175 h60
  text "HIGH BACKUP" at 4431,4077 h60
  text "1uF" at 3935,4075 h60
  text "1uF" at 5421,4075 h60
  text "10uF" at 3935,3975 h60
  text "10uF" at 5421,3975 h60
  text "1uF" at 3935,3875 h60
  text "1uF" at 5421,3875 h60
  text "CUSTOM HIGH" at 4528,3873 h60
  text "THIS SIDE NEAR BBB ETHERNET PORT" at 1151,3777 h60
  text "GND" at 5006,3556 h60
  text "LM321" at 4117,3378 h60
  text "5MOhm" at 3396,3298 h60 r90
  text "7MOhm" at 3611,3242 h60
  text "250 Ohm" at 5780,3226 h60
  text "1MOhm" at 3617,3103 h60
  text "D1N4001" at 5201,3069 h60 r90
  text "LM321" at 4115,2968 h60
  text "LM317" at 4703,2899 h60
  text "3MOhm" at 3398,2880 h60 r90
  text "1uF" at 4281,2665 h60
  text "1uF" at 3929,2578 h60
  text "AD5293" at 3427,2446 h60
  text "1uF" at 4278,2399 h60
  text "D1N4001" at 5207,2377 h60 r90
  text "1uF" at 3931,2059 h60
  text "AD5293" at 3422,1936 h60
  text "250 Ohm" at 5775,1879 h60
  text "D1N4001" at 5214,1672 h60 r90
  text "LM317" at 4718,1608 h60
  text "5MOhm" at 3394,1522 h60 r90
  text "LM321" at 3943,1478 h60
  text "7MOhm" at 3609,1466 h60
  text "1uF" at 4280,1428 h60
  text "1MOhm" at 3615,1327 h60
  text "0.1 uF | 0603" at 6165,1225 h100
  text "0.1 uF | 0603" at 10065,1225 h100
  text "1uF" at 4278,1144 h60
  text "3MOhm" at 3396,1104 h60 r90
  text "LM321" at 3941,1068 h60
  text "D1N4001" at 5216,1001 h60 r90
  text "GND" at 4967,789 h60
  text "CUSTOM LOW" at 4433,477 h60
  text "10kOhm" at 2584,325 h60
  text "GND" at 4530,273 h60
  text "FPGA RESET" at 1737,84 h60